# Altium PCB flowhw.PcbDoc (part 1 of 2)
Units mil, origin at the board's own origin, x right, y up, seen from the top; angles counter-clockwise.
Board outline 4650 x 1950 mil, 4 copper layers (Top Layer, Layer 1, Layer 2, Bottom Layer), stack 23.756 mil thick; 120 components, 77 nets, 417 pads, 937 vias.
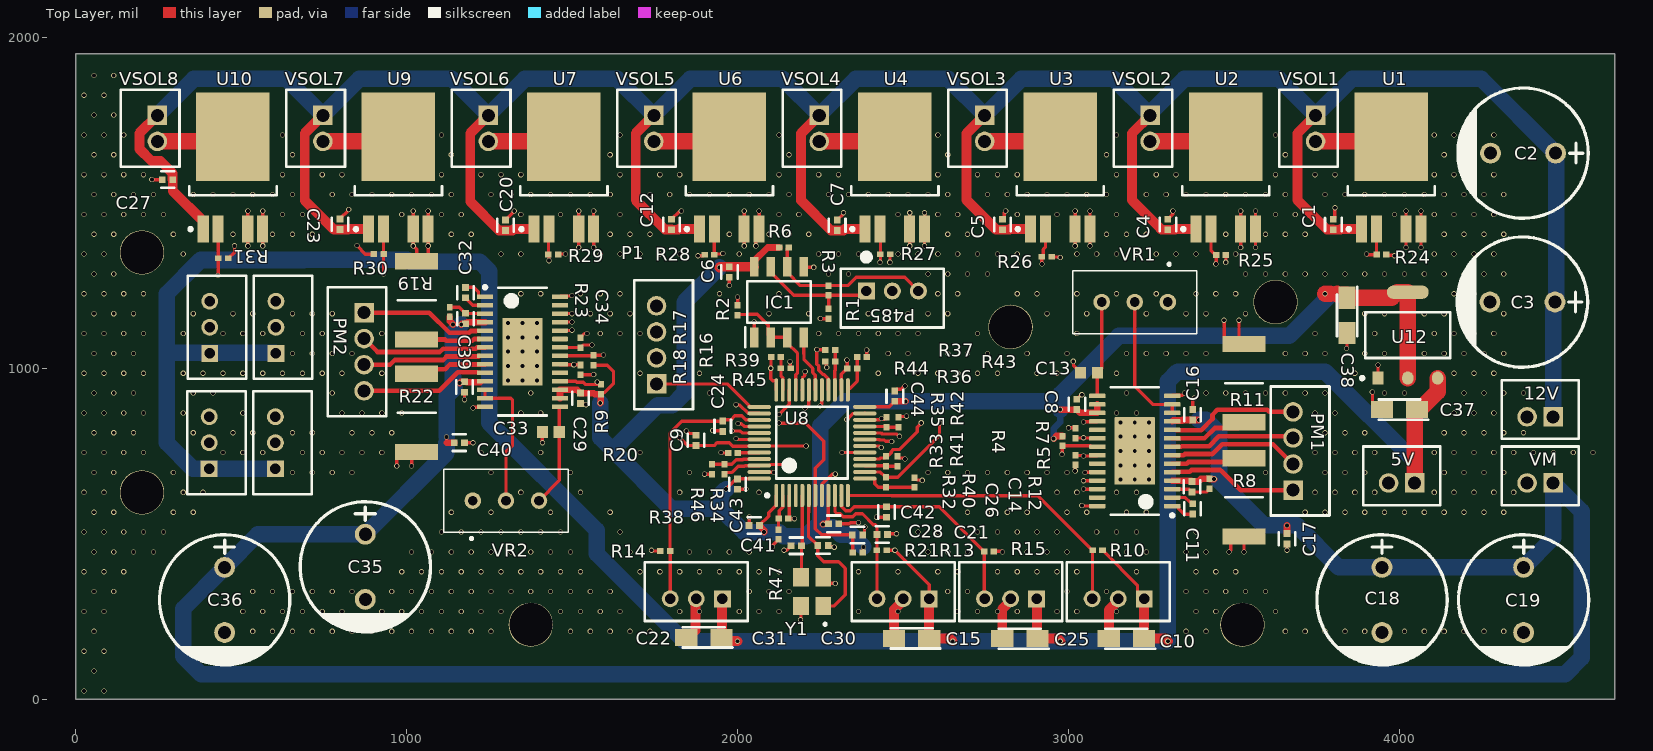
[diagram p0: Top Layer view]
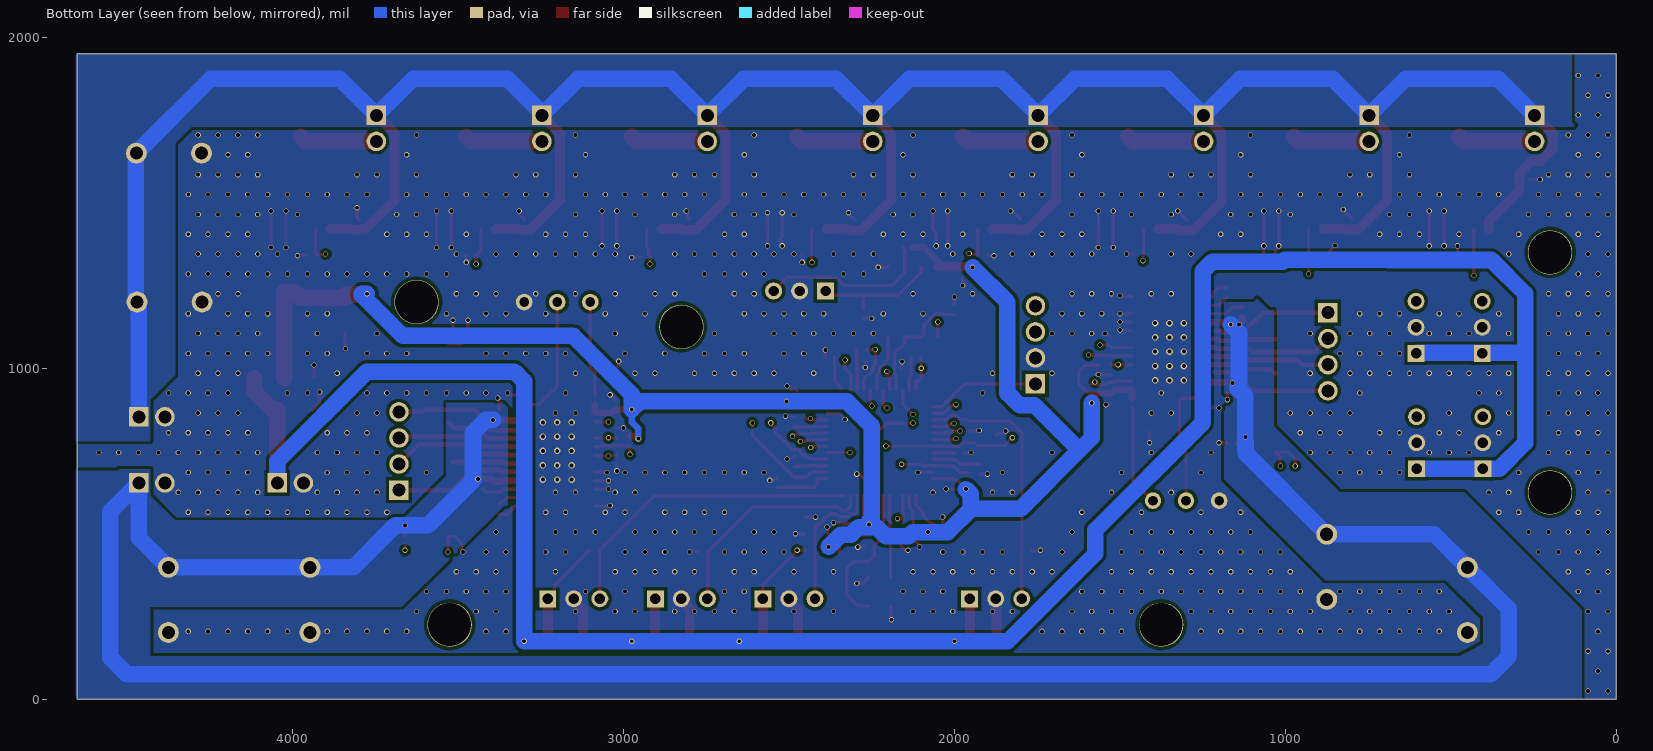
[diagram p1: Bottom Layer view, seen from below]
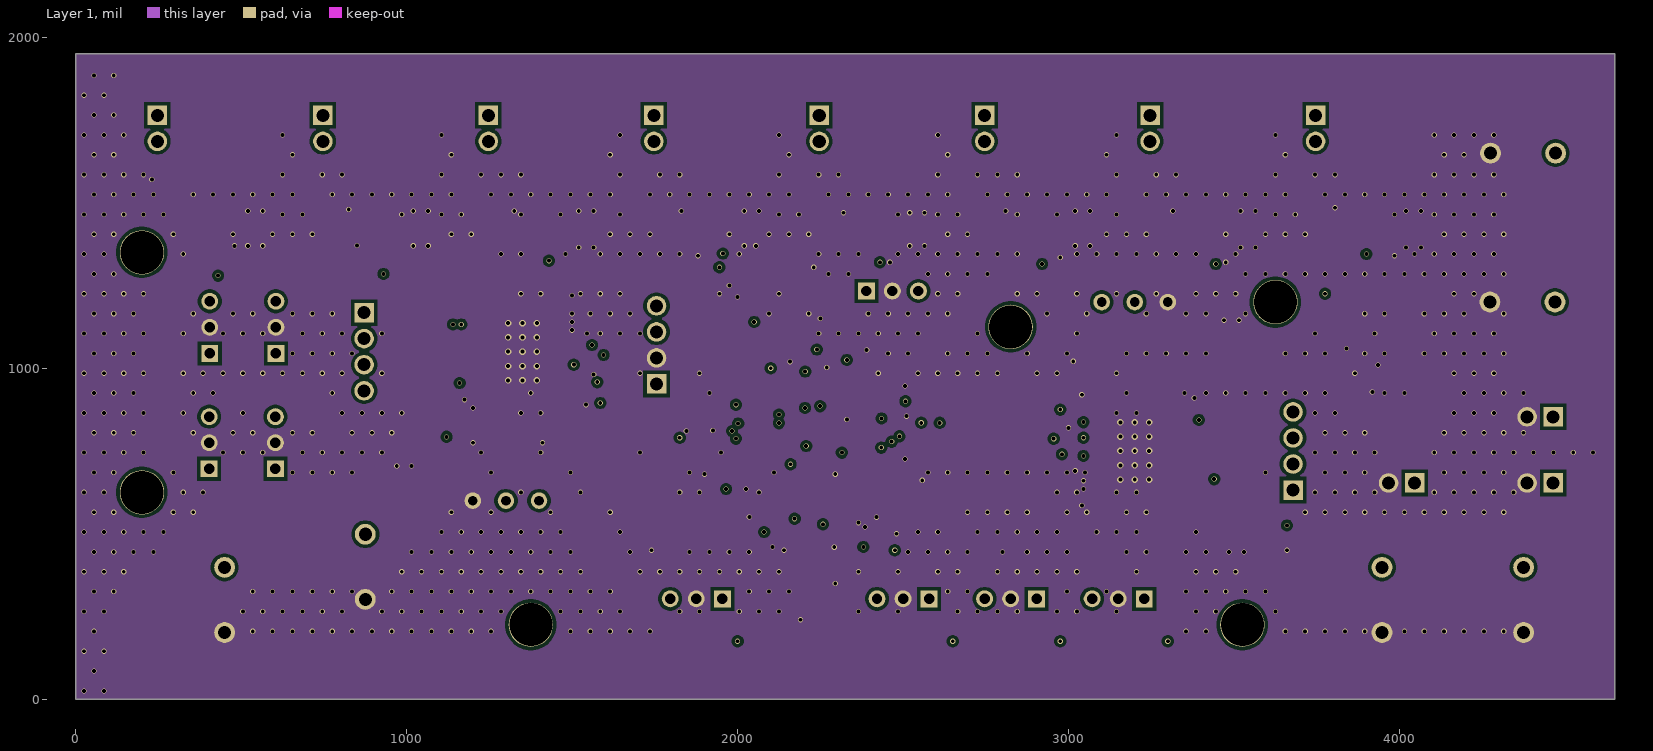
[diagram p2: Layer 1]
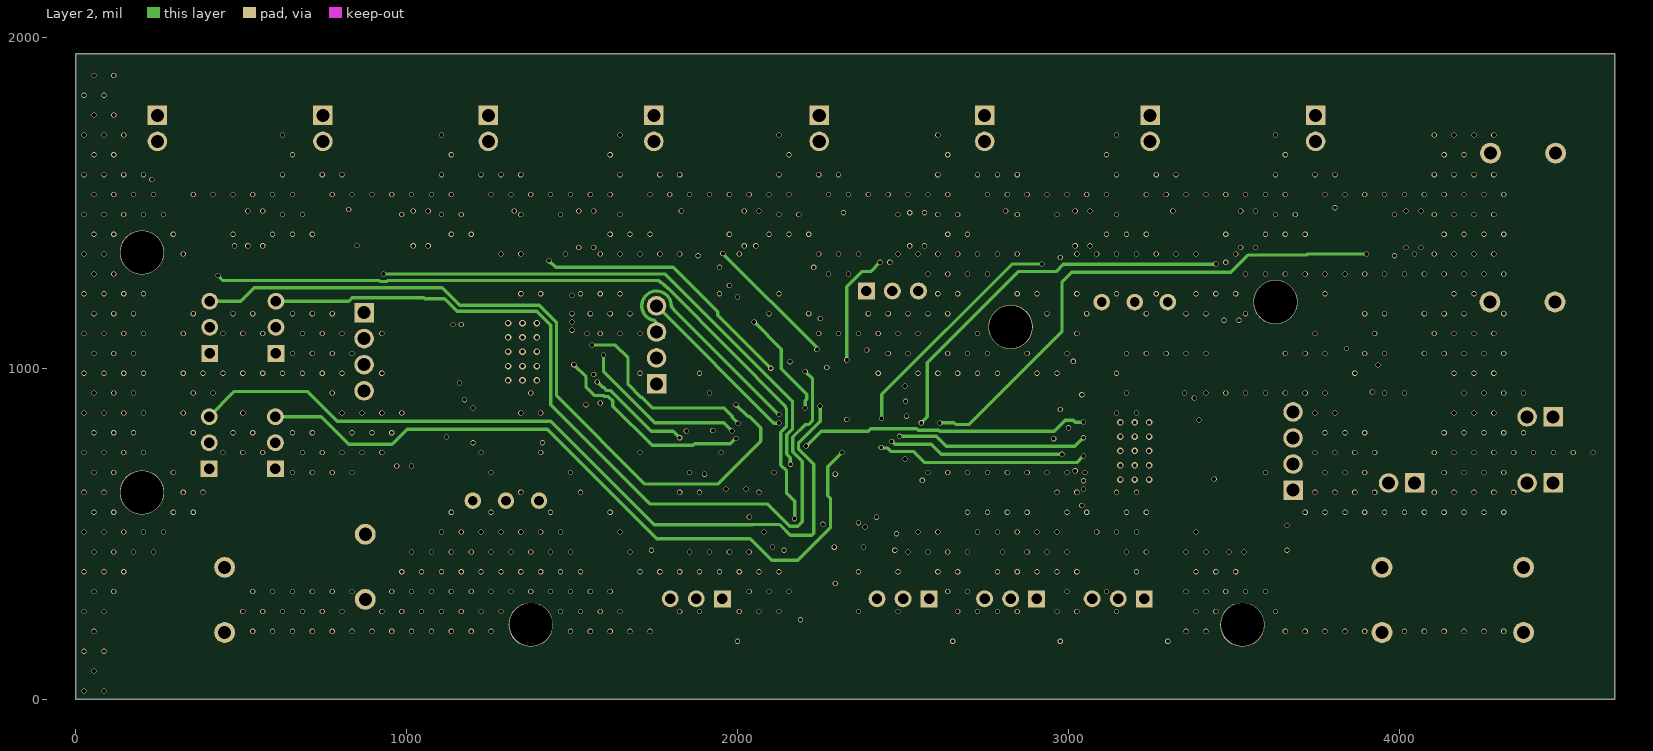
[diagram p3: Layer 2]

## Layer stack, top to bottom
Top Solder: solder mask 0.4, Solder Resist, Dk 3.5
Top Layer: signal copper 1.4
Dielectric 2: prepreg 2.8, PP-006, Dk 4.1
Layer 1: signal copper 1.378
Dielectric 1: dielectric 12.6, FR-4, Dk 4.8
Layer 2: signal copper 1.378
Dielectric 3: prepreg 2.8, PP-006, Dk 4.1
Bottom Layer: signal copper 1.4
Bottom Solder: solder mask 0.4, Solder Resist, Dk 3.5

## Board outline
0,1950 4650,1950 4650,0 0,0

## Design rules (kind name [scope] priority, off if disabled: settings)
Clearance [All] p1: gap=10 ignorepadtopadclearanceinfootprint=FALSE except(0: Arc-Hole Track-Hole SMDPad-Hole THPad-Hole Via-Hole Fill-Hole Poly-Hole Region-Hole Text-Hole; 6: Arc-SMDPad Track-SMDPad SMDPad-SMDPad; 8: Arc-Arc Arc-Track Track-Track)
HoleSize [All] p1: absolutevalues=TRUE maxlimit=500 minlimit=1 maxpercent=80.000 minpercent=20.000
MinimumSolderMaskSliver [All] p1: minsoldermaskwidth=1
PolygonConnect [HasFootprint('RESC1005X40X25LL05T10')] p1: connectstyle=Relief reliefconductorwidth=10 reliefentries=4 polygonreliefangle="90 Angle" airgapwidth=10
PolygonConnect PolygonConnect_2 [HasFootprint('FP-C0402-BB-MFG')] p2: connectstyle=Relief reliefconductorwidth=10 reliefentries=4 polygonreliefangle="90 Angle" airgapwidth=10
PolygonConnect PolygonConnect_1 [All] p3: connectstyle=Direct reliefconductorwidth=10 reliefentries=4 polygonreliefangle="90 Angle" airgapwidth=10
RoutingVias [All] p1: holewidth=11.81 width=15.75 viastyle="Through Hole" minholewidth=11.81 minwidth=15.75 maxholewidth=15.75 maxwidth=31.5
SilkToSilkClearance [All] p1: silktosilkclearance=6
SilkToSolderMaskClearance [IsPad] p1: minsilkscreentomaskgap=0.5 clearancetoexposedcopper=TRUE
SolderMaskExpansion [IsVia] p1: expansion=4 istentingtop=TRUE
SolderMaskExpansion SolderMaskExpansion_1 [All] p2: expansion=4 istentingtop=FALSE
Width [All] p1: maxlimit=50 minlimit=7 preferedwidth=10
26 further rules are at their usual default settings.

## Components (designator, comment, footprint, x,y, rotation, side; value= is the part's Value field where it differs from the comment)
5V "B2B-PH-K-S(LF)(SN)" JST-B2B-PH-K-S_V 4006.5,675 r180 top
12V "B2B-PH-K-S(LF)(SN)" JST-B2B-PH-K-S_V 4425,875 r180 top
C1 "100n" FP-C0402-BB-MFG 3800,1434.25 r270 top value="8.2 pF"
C2 "470uF" 470UF 4373.42,1650 r180 top
C3 "470uF" 470UF 4371.57,1200 r180 top
C4 "100n" FP-C0402-BB-MFG 3300,1434.25 r270 top value="8.2 pF"
C5 "100n" FP-C0402-BB-MFG 2800,1434.25 r270 top value="8.2 pF"
C6 "100n" FP-C0402-BB-MFG 1975,1290.75 r270 top value="8.2 pF"
C7 "100n" FP-C0402-BB-MFG 2300.9,1432.32 r270 top value="8.2 pF"
C8 "100n" FP-C0402-BB-MFG 3025,890.75 r90 top value="8.2 pF"
C9 "10n" FP-C0402-BB-MFG 1874.03,782.09 r90 top value="8.2 pF"
C10 "TAJA226K010RNJ" CAPPM3216X180N 3174.77,182.77 r180 top
C11 "10n" FP-C0402-BB-MFG 3375,575 r270 top value="8.2 pF"
C12 "100n" FP-C0402-BB-MFG 1800,1434.25 r270 top value="8.2 pF"
C13 "0.47uf" CAPC1608X90X35LL15T15 3061.28,986.31 r0 top
C14 "100n" FP-C0402-BB-MFG 3373.24,641.74 r270 top value="8.2 pF"
C15 "TAJA226K010RNJ" CAPPM3216X180N 2525.97,183.64 r180 top
C16 "100n" FP-C0402-BB-MFG 3375,859.25 r270 top value="8.2 pF"
C17 "100n" FP-C0402-BB-MFG 3660,485 r90 top value="8.2 pF"
C18 "470uF" 470UF 3947.19,300 r270 top
C19 "470uF" 470UF 4375,300 r270 top
C20 "100n" FP-C0402-BB-MFG 1298.3,1431.88 r270 top value="8.2 pF"
C21 "10n" FP-C0402-BB-MFG 2437.16,497.52 r0 top value="8.2 pF"
C22 "TAJA226K010RNJ" CAPPM3216X180N 1897.78,186.85 r180 top
C23 "100n" FP-C0402-BB-MFG 798.32,1435.27 r270 top value="8.2 pF"
C24 "10n" FP-C0402-BB-MFG 1955,825 r270 top value="8.2 pF"
C25 "TAJA226K010RNJ" CAPPM3216X180N 2852.79,182.83 r180 top
C26 "10n" FP-C0402-BB-MFG 2450,565.75 r270 top value="8.2 pF"
C27 "100n" FP-C0402-BB-MFG 277.51,1569.91 r0 top value="8.2 pF"
C28 "10n" FP-C0402-BB-MFG 2362.26,496.47 r0 top value="8.2 pF"
C29 "100n" FP-C0402-BB-MFG 1525,909.25 r270 top value="8.2 pF"
C30 "20p" FP-C0402-BB-MFG 2257.82,464.47 r0 top value="8.2 pF"
C31 "20p" FP-C0402-BB-MFG 2177.32,463.65 r0 top value="8.2 pF"
C32 "10n" FP-C0402-BB-MFG 1177.45,1228.62 r90 top value="8.2 pF"
C33 "0.47uf" CAPC1608X90X35LL15T15 1435.52,807.08 r0 top
C34 "100n" FP-C0402-BB-MFG 1177.44,1150.11 r90 top value="8.2 pF"
C35 "470uF" 470UF 875,400 r270 top
C36 "470uF" 470UF 450,300 r270 top
C37 "TAJA106K016RNJV" CAPPM3216X180N 4000,875 r180 top
C38 "TAJA226K010RNJ" CAPPM3216X180N 3841.61,1159.96 r270 top
C39 "100n" FP-C0402-BB-MFG 1174.6,943.43 r90 top value="8.2 pF"
C40 "100n" FP-C0402-BB-MFG 1159.25,775 r180 top value="8.2 pF"
C41 "100n" FP-C0402-BB-MFG 2050,525 r0 top value="8.2 pF"
C42 "100n" FP-C0402-BB-MFG 2290,530 r180 top value="8.2 pF"
C43 "100n" FP-C0402-BB-MFG 2000,650 r90 top value="8.2 pF"
C44 "100n" FP-C0402-BB-MFG 2475,915.75 r270 top value="8.2 pF"
IC1 "ST1480ABDR" SOIC127P600X175-8N 2125,1200 r90 top
P1 "B4B-PH-K-S(LF)(SN)" JST-B4B-PH-K-S_V 1776.65,1070.63 r90 top
P485 "B3B-PH-K-S(LF)(SN)" JST-B3B-PH-K-S-3_V 2467.63,1211.76 r0 top
PM1 "B4B-PH-K-S(LF)(SN)" JST-B4B-PH-K-S_V 3700,750 r90 top
PM2 "B4B-PH-K-S(LF)(SN)" JST-B4B-PH-K-S_V 850,1050 r270 top
R1 "4.7k" RESC1005X40X25LL05T10 2275,1164.76 r90 top
R2 "10k" RESC1005X40X25LL05T10 2000,1175 r90 top
R3 "120" RESC1005X40X25LL05T10 2275,1235.24 r90 top
R4 "10k" RESC1005X40X25LL05T10 2981.2,780.34 r270 top
R5 "10k" RESC1005X40X25LL05T10 3020.82,723.03 r90 top
R6 "4.7k" RESC1005X40X25LL05T10 2140.47,1365 r180 top
R7 "10k" RESC1005X40X25LL05T10 3020.82,803.23 r270 top
R8 "CR2512-F_-1R00ELF" RESC6331X75N 3530,610 r270 top
R9 "10k" RESC1005X40X25LL05T10 1586.96,936.28 r90 top
R10 "4.7k" RESC1005X40X25LL05T10 3087.8,449.93 r180 top
R11 "CR2512-F_-1R00ELF" RESC6331X75N 3530,955 r90 top
R12 "1M" RESC1005X40X25LL05T10 3425.7,650.95 r270 top
R13 "4.7k" RESC1005X40X25LL05T10 2435.85,449.93 r0 top
R14 "4.7k" RESC1005X40X25LL05T10 1781.19,447.86 r180 top
R15 "4.7k" RESC1005X40X25LL05T10 2759.35,446.78 r0 top
R16 "10k" RESC1005X40X25LL05T10 1564.56,1023.98 r90 top
R17 "10k" RESC1005X40X25LL05T10 1525,1076.97 r270 top
R18 "10k" RESC1005X40X25LL05T10 1525,995.08 r90 top
R19 "CR2512-F_-1R00ELF" RESC6331X75N 1030,1205 r90 top
R20 "4.7k" RESC1005X40X25LL05T10 1985.94,743.39 r180 top
R21 "100k" RESC1005X40X25LL05T10 2363.17,442.95 r0 top
R22 "CR2512-F_-1R00ELF" RESC6331X75N 1030,865 r270 top
R23 "1M" RESC1005X40X25LL05T10 1130,1170 r90 top
R24 "10k" RESC1005X40X25LL05T10 3945.45,1343.23 r0 top
R25 "10k" RESC1005X40X25LL05T10 3460.68,1341.75 r0 top
R26 "10k" RESC1005X40X25LL05T10 2933.82,1336.87 r0 top
R27 "10k" RESC1005X40X25LL05T10 2446.47,1344.53 r0 top
R28 "10k" RESC1005X40X25LL05T10 1914.74,1343.1 r180 top
R29 "10k" RESC1005X40X25LL05T10 1443.16,1343.21 r0 top
R30 "10k" RESC1005X40X25LL05T10 915.49,1344.76 r180 top
R31 "10k" RESC1005X40X25LL05T10 445.76,1332.39 r0 top
R32 "3.3k" RESC1005X40X25LL05T10 2448.47,655.58 r90 top
R33 "3.3k" RESC1005X40X25LL05T10 2448.47,718.63 r90 top
R34 "3.3k" RESC1005X40X25LL05T10 1960,695 r90 top
R35 "3.3k" RESC1005X40X25LL05T10 2450.38,836.66 r270 top
R36 "3.3k" RESC1005X40X25LL05T10 2346.6,999.51 r0 top
R37 "3.3k" RESC1005X40X25LL05T10 2280,1055 r0 top
R38 "3.3k" RESC1005X40X25LL05T10 2138.79,546.22 r0 top
R39 "3.3k" RESC1005X40X25LL05T10 2116.15,1033.64 r180 top
R40 "100k" RESC1005X40X25LL05T10 2535,655 r90 top
R41 "100k" RESC1005X40X25LL05T10 2483.65,718.96 r90 top
R42 "100k" RESC1005X40X25LL05T10 2485.8,836.7 r90 top
R43 "100k" RESC1005X40X25LL05T10 2375.84,1034.41 r0 top
R44 "100k" RESC1005X40X25LL05T10 2280,1020 r180 top
R45 "100k" RESC1005X40X25LL05T10 2145.63,999.83 r0 top
R46 "100k" RESC1005X40X25LL05T10 1923.12,695.01 r270 top
R47 "100k" RESC1005X40X25LL05T10 2123.11,497.39 r270 top
U1 "BTS3256D" INF-PG-TO252-5-1_M 3975,1607.48 r90 top
U2 "BTS3256D" INF-PG-TO252-5-1_M 3475,1607.48 r90 top
U3 "BTS3256D" INF-PG-TO252-5-1_M 2975,1607.48 r90 top
U4 "BTS3256D" INF-PG-TO252-5-1_M 2475,1607.48 r90 top
U6 "BTS3256D" INF-PG-TO252-5-1_M 1975,1607.48 r90 top
U7 "BTS3256D" INF-PG-TO252-5-1_M 1475,1607.48 r90 top
U8 "STM32F051C8T6" STM-LQFP48_N 2225,775 r90 top
U9 "BTS3256D" INF-PG-TO252-5-1_M 975,1607.48 r90 top
U10 "BTS3256D" INF-PG-TO252-5-1_M 475,1607.48 r90 top
U12 "AMS1117-3.3" FP-AMS1117-IPC_C 4025,1100 r90 top
VM "B2B-PH-K-S(LF)(SN)" JST-B2B-PH-K-S_V 4425,675 r180 top
VR1 "3296W-1-103" 3296W1103 3300,1200 r270 top
VR2 "3296W-1-103" 3296W1103 1200,600 r90 top
VSOL1 "B2B-PH-K-S(LF)(SN)" JST-B2B-PH-K-S_V 3725,1725 r270 top
VSOL2 "B2B-PH-K-S(LF)(SN)" JST-B2B-PH-K-S_V 3225,1725 r270 top
VSOL3 "B2B-PH-K-S(LF)(SN)" JST-B2B-PH-K-S_V 2725,1725 r270 top
VSOL4 "B2B-PH-K-S(LF)(SN)" JST-B2B-PH-K-S_V 2225,1725 r270 top
VSOL5 "B2B-PH-K-S(LF)(SN)" JST-B2B-PH-K-S_V 1725,1725 r270 top
VSOL6 "B2B-PH-K-S(LF)(SN)" JST-B2B-PH-K-S_V 1225,1725 r270 top
VSOL7 "B2B-PH-K-S(LF)(SN)" JST-B2B-PH-K-S_V 725,1725 r270 top
VSOL8 "B2B-PH-K-S(LF)(SN)" JST-B2B-PH-K-S_V 225,1725 r270 top
Y1 "X322516MLB4SI" X322516MLB4SI 2225,325 r90 top

## Footprints (in the part's own frame and the unit in brackets; to place one, negate y for a bottom-side part, rotate by r counter-clockwise, add the part's x,y. Pads: shape width x height; smd on the part's side, far side on the other; paste and mask are expansions set on the pad)
470UF [mm]
  round 1.6 hole 1: 1(-2.5,0) 2(2.5,0)
  silkscreen extent -5,-5 5.08,5
3296W1103 [mm]
  round 1.269 hole 0.74: 1(0,0) 2(0,-2.54) 3(0,-5.08)
  silkscreen extent -3,-7.3 2.42,2.22, body extent -2.42,-7.29 2.42,2.21, height 11.44
CAPC1608X90X35LL15T15 [mm] "Chip Capacitor, 2-Leads, Body 1.60x0.81mm, IPC High Density"
  rect 0.85x0.9 smd: 1(-0.65,0) 2(0.65,0)
  body extent -0.88,-0.48 0.87,0.48, height 0.9
CAPPM3216X180N [mm]
  rect 1.7x1.3 smd: 1(-1.35,0) 2(1.35,0)
  silkscreen extent -2.2,-0.77 1.6,0.77, body extent -1.6,-0.77 1.6,0.77, height 1.8
FP-AMS1117-IPC_C [mm]
  rect 1.004x0.872 smd paste+0 mask+0: 1(-3.295,2.29)
  rrect100% 1.004x0.872 smd paste+0 mask+0: 2(-3.295,0) 3(-3.295,-2.29)
  rrect87% 1.004x3.182 smd paste+0 mask+0: 4(3.295,0)
  silkscreen extent -3.42,-3.25 1.75,3.62, body extent -3.9,-3.35 3.9,3.35, height 0.25
FP-C0402-BB-MFG [mm]
  rect 0.52x0.52 smd paste+0 mask+0: 1(-0.4,0) 2(0.4,0)
  silkscreen extent -0.5,-0.64 0.5,0.64, body extent -0.8,-0.4 0.8,0.4, height 0.25
INF-PG-TO252-5-1_M [mm] "DPAK, 5-Leads, Body 6.5x6.12mm, Pitch 1.14mm, IPC Low Density"
  rect 2.05x0.85 smd: 1(-4.75,2.28) 2(-4.75,1.14) 4(-4.75,-1.14) 5(-4.75,-2.28)
  rect 6.8x5.65 smd: 3(2.35,0)
  silkscreen extent -4.87,-3.35 -1.45,3.38, body extent -2.15,-3.32 4.07,3.32, height 2.35
JST-B2B-PH-K-S_V [mm] "Connector, 2-Leads, Body 5.9x4.5mm, Pitch 2mm"
  rect 1.5x1.5 hole 1: 1(-1,0.55)
  round 1.5 hole 1: 2(1,0.55)
  silkscreen extent -2.95,-2.25 2.95,2.25, body extent -2.95,-2.25 2.95,2.25, height 6
JST-B3B-PH-K-S-3_V [mm] "Connector, 3-Leads, Body 7.9x4.5mm, Pitch 2mm"
  rect 1.3x1.3 hole 0.8: 1(-2,0.55)
  round 1.3 hole 0.8: 2(0,0.55) 3(2,0.55)
  silkscreen extent -3.95,-2.25 3.95,3.4, body extent -3.95,-2.25 3.95,2.25, height 6
JST-B4B-PH-K-S_V [mm] "Connector, 4-Leads, Body 9.9x4.5mm, Pitch 2mm"
  rect 1.5x1.5 hole 1: 1(-3,0.55)
  round 1.5 hole 1: 2(-1,0.55) 3(1,0.55) 4(3,0.55)
  silkscreen extent -4.95,-2.25 4.95,2.25, body extent -4.95,-2.25 4.95,2.25, height 6
RESC1005X40X25LL05T10 [mm] "Chip Resistor, 2-Leads, Body 1.00x0.50mm, IPC High Density"
  rect 0.5x0.45 smd: 1(-0.375,0) 2(0.375,0)
  body extent -0.53,-0.27 0.53,0.28, height 0.4
RESC6331X75N [mm]
  rect 1.25x3.3 smd: 1(-3,0) 2(3,0)
  silkscreen extent 0,-1.45 0,1.45, body extent -3.15,-1.55 3.15,1.55, height 0.75
SOIC127P600X175-8N [mm]
  rect 1.525x0.65 smd: 1(-2.712,1.905) 2(-2.712,0.635) 3(-2.712,-0.635) 4(-2.712,-1.905) 5(2.712,-1.905) 6(2.712,-0.635) 7(2.712,0.635) 8(2.712,1.905)
  silkscreen extent -3.47,-2.45 1.6,2.58, body extent -3,-2.45 3,2.45, height 1.75
STM-LQFP48_N [mm] "QFP, 48-Leads, Body 7x7mm, Pitch 0.5mm, IPC Medium Density"
  oval 1.8x0.3 smd: 1(-4.05,2.75) 2(-4.05,2.25) 3(-4.05,1.75) 4(-4.05,1.25) 5(-4.05,0.75) 6(-4.05,0.25) 7(-4.05,-0.25) 8(-4.05,-0.75) 9(-4.05,-1.25) 10(-4.05,-1.75) 11(-4.05,-2.25) 12(-4.05,-2.75) 25(4.05,-2.75) 26(4.05,-2.25) 27(4.05,-1.75) 28(4.05,-1.25) 29(4.05,-0.75) 30(4.05,-0.25) 31(4.05,0.25) 32(4.05,0.75) 33(4.05,1.25) 34(4.05,1.75) 35(4.05,2.25) 36(4.05,2.75)
  oval 0.3x1.8 smd: 13(-2.75,-4.05) 14(-2.25,-4.05) 15(-1.75,-4.05) 16(-1.25,-4.05) 17(-0.75,-4.05) 18(-0.25,-4.05) 19(0.25,-4.05) 20(0.75,-4.05) 21(1.25,-4.05) 22(1.75,-4.05) 23(2.25,-4.05) 24(2.75,-4.05) 37(2.75,4.05) 38(2.25,4.05) 39(1.75,4.05) 40(1.25,4.05) 41(0.75,4.05) 42(0.25,4.05) 43(-0.25,4.05) 44(-0.75,4.05) 45(-1.25,4.05) 46(-1.75,4.05) 47(-2.25,4.05) 48(-2.75,4.05)
  silkscreen extent -4.17,-2.75 2.75,3.57, body extent -3.5,-3.5 3.5,3.5, height 1.6
X322516MLB4SI [mm]
  rect 1.4x1.2 smd: 1(-1.1,-0.85) 2(1.1,-0.85) 3(1.1,0.85) 4(-1.1,0.85)
  silkscreen extent -2.6,-1.1 -2.4,-0.9, body extent -1.6,-1.25 1.6,1.25, height 0.7

## Part data
5V 12V VM VSOL1 VSOL2 VSOL3 VSOL4 VSOL5 VSOL6 VSOL7 VSOL8: library part CMP-2000-05162-1, "Male Header, Pitch 2 mm, 1 x 2 Position, Height 6 mm, Tail Length 3.4 mm, -25 to 85 degC, RoHS, Bulk", Manufacturer=JST, Datasheet URL=http://datasheet.octopart.com/B2B-PH-K-S%28LF%29%28SN%29-JST-datasheet-8324864.pdf, Datasheet Version=Nov-08, Manufacturer URL=http://www.jst.com/home2.html, No of Positions=2, Pitch=2mm, Style/Orientation=StraightHeader/Plug, Termination=Crimp, Type=ShroudedHeader
C1 C4 C5 C6 C7 C8 C9 C11 C12 C14 C16 C17 C20 C21 C23 C24 C26 C27 C28 C29 C30 C31 C32 C34 C39 C40 C41 C42 C43 C44: library part CMP-03020-024178-1, "C0402 8.2 pF C0G 0.5 pF 50 V", Capacitance="8.2 pF", Manufacturer=Kemet, Manufacturer Part Number=C0402C829D5GACAUTO, Package=C0402-BB, Temperature="-55°C to +125°C", Temperature Characteristic=C0G, Temperature Coefficient=15%, Temperature Range High=+125°C, Temperature Range Low=-55°C, Tolerance="0.5 pF", Voltage Rating="50 V", Automotive=No, Category=Cap, ComponentLink2Description=Datasheet, ComponentLink2URL=https://content.kemet.com/datasheets/KEM_C1002_X7R_SMD.pdf, Device Class L1="Passive Components", Device Class L2=Capacitors, Device Class L3="Ceramic Capacitors", Height=0.55mm, Ipc Land Pattern Name=CAPC10050X50, Lead Free=Yes, Material=Ceramic, Octopart=https://octopart.com/c0402c829d5gacauto-kemet-89441553, RoHS=TRUE
C2 C3 C18 C19 C35 C36: library part SPZ1VM471G13O00RAXXX, Equivalent Series Resistance(ESR)=-, JLCPCB Part Class="Extended Part", LCSC Part Name="470uF ±20% 35V", Manufacturer=AISHI(艾华集团), Operating Temperature=-55℃~+105℃, Tolerance=±20%, Voltage Rating=35V, Add into BOM=yes, Convert to PCB=yes, Datasheet=https://item.szlcsc.com/datasheet/SPZ1VM471G13O00RAXXX/2802119.html, Device=SPZ1VM471G13O00RAXXX, Diameter=10mm, Height - Seated (Max)=13mm, Lifetime=2000hrs@105℃, Manufacturer Part=SPZ1VM471G13O00RAXXX, Pin Spacing=-, Ripple Current=-, Supplier=LCSC, Supplier Footprint=插件,D10xL13mm, Supplier Part=C2691847, Symbol=SPZ1VM471G13O00RAXXX, Type=Polymer
C10 C15 C22 C25 C38: "Capacitor Polarised", Manufacturer_Name="Kyocera AVX", Mouser Part Number=581-TAJA226K010R, Arrow Part Number=TAJA226K010RNJ, Arrow Price/Stock=https://www.arrow.com/en/products/taja226k010rnj/avx?region=nac, Datasheet Link=http://www.farnell.com/datasheets/1680476.pdf, Height=1.8mm, Manufacturer_Part_Number=TAJA226K010RNJ, Mouser Price/Stock=https://www.mouser.co.uk/ProductDetail/KYOCERA-AVX/TAJA226K010RNJ?qs=ZfDiupplM3QM%252BN91%252BvwCuQ%3D%3D
C13 C33: library part CMP-2006-02133-1, Manufacturer="AVX Interconnect / Elco", Part Number=0603ZC101KAT2A
C37: "Capacitor Polarised", Manufacturer_Name="Kyocera AVX", Mouser Part Number=581-TAJA106K016RNJV, Arrow Part Number=TAJA106K016RNJV, Arrow Price/Stock=https://www.arrow.com/en/products/taja106k016rnjv/avx?utm_currency=USD&region=nac, Datasheet Link=http://www.farnell.com/datasheets/1680476.pdf, Height=1.8mm, Manufacturer_Part_Number=TAJA106K016RNJV, Mouser Price/Stock=https://www.mouser.co.uk/ProductDetail/KYOCERA-AVX/TAJA106K016RNJV?qs=X421pCAdHWe2u1fVMeO6XQ%3D%3D
IC1: "Integrated Circuit", Manufacturer_Name=STMicroelectronics, Mouser Part Number=511-ST1480ABDR, Arrow Part Number=ST1480ABDR, Arrow Price/Stock=https://www.arrow.com/en/products/st1480abdr/stmicroelectronics?region=nac, Datasheet Link=https://www.st.com/resource/en/datasheet/st1480ab.pdf, Height=1.75mm, Manufacturer_Part_Number=ST1480ABDR, Mouser Price/Stock=https://www.mouser.co.uk/ProductDetail/STMicroelectronics/ST1480ABDR?qs=U1cgCdF9Le885kMYiMY8iw%3D%3D
P1 PM1 PM2: library part CMP-2000-05165-1, "Male Header, Pitch 2 mm, 1 x 4 Position, Height 6 mm, Tail Length 3.4 mm, -25 to 85 degC, RoHS, Bulk", Manufacturer=JST, Datasheet URL=http://datasheet.octopart.com/B4B-PH-K-S%28LF%29%28SN%29-JST-datasheet-10558886.pdf, Datasheet Version=Apr-09, Manufacturer URL=http://www.jst.com/home2.html, No of Positions=4, Pitch=2mm, Style/Orientation=StraightHeader/Plug, Termination=Crimp, Type=ShroudedHeader
P485: library part CMP-2000-05164-1, "Male Header, Pitch 2 mm, 1 x 3 Position, Height 6 mm, Tail Length 3.4 mm, -25 to 85 degC, RoHS, Bulk", Manufacturer=JST, Datasheet URL=https://datasheet.ciiva.com/11746/0900766b80826550-11746939.pdf, Datasheet Version=Oct-06, Manufacturer URL=http://www.jst.com/home2.html, No of Positions=3, Pitch=2mm, Style/Orientation=StraightHeader/Plug, Termination=Crimp, Type=ShroudedHeader
R1 R2 R3 R4 R5 R6 R7 R9 R10 R12 R13 R14 R15 R16 R17 R18 R20 R21 R23 R24 R25 R26 R27 R28 R29 R30 R31 R32 R33 R34 R35 R36 R37 R38 R39 R40 R41 R42 R43 R44 R45 R46 R47: library part CMP-2002-07161-1, Manufacturer="Yageo / Phycomp", Part Number=RC0402FR-0720R5L
R8 R11 R19 R22: "Resistor", Arrow Part Number=CR2512-F/-1R00ELF, Manufacturer_Name=Bourns, Mouser Part Number=652-CR2512-F/1R00ELF, Arrow Price/Stock=https://www.arrow.com/en/products/cr2512-f-1r00elf/bourns?utm_currency=USD&region=europe, Height=0.75mm, Manufacturer_Part_Number=CR2512-F/-1R00ELF, Mouser Price/Stock=https://www.mouser.co.uk/ProductDetail/Bourns/CR2512-F-1R00ELF?qs=W%2FMpXkg%252BdQ6b1PcPiGLK9Q%3D%3D
U1 U2 U3 U4 U6 U7 U9 U10: library part CMP-1137-00035-1, "HITFET 10 mOhm Smart Power Single Channel Low Side Switch with Restart and Variable Slew Rate, 40 V VDS, ID, -40 to 150 degC, PG-TO252-5-1, Reel, Green", Manufacturer=Infineon, Channels=1, ComponentLink1Description="Manufacturer URL", ComponentLink1URL=http://www.infineon.com/, ComponentLink2Description=Datasheet, ComponentLink2URL=http://www.infineon.com/dgdl/BTS3256_DS_10.pdf?folderId=db3a3043163797a6011667aa084c0e01&fileId=db3a304320d39d590121a175cad77b78&location=en.Products.Automotive_ICs.Smart_High-_and_Low-Side_Switches.HITFET___TEMPFET__-_Smart_Low-Side_Switches.DATASHEET.BTS, ComponentLink3Description="Package Specification", ComponentLink3URL=http://www.infineon.com/cms/packages/SMD_-_Surface_Mounted_Devices/P-PG-TO252/P-PG-TO252-05-001.html?__locale=en, DatasheetVersion="Rev. 1.0", Green=TRUE, Group=HITFET, Halogen-free=TRUE, ID(lim) (min)="42 A", ID(nom)="7.5 A", ISC (max)="30 A", Mounting Technology="Surface Mount", PackageDescription="5-Pin Plastic (Green) Transistor Single Outline Package, 6.5 x 6.12 mm Body, 1.14 mm Pitch", PackageReference=PG-TO252-5-1, Packing=Reel, PartNumber=BTS3256D, RDS (on)(max)="10 mOhm", toff (max)="24 us", ton (max)="22 us", VDS (max)="40 V"
U8: library part CMP-0304-00010-3, "ARM Cortex-M0 32-bit MCU, 64 KB Flash, 8 KB Internal RAM, 39 I/Os, 48-pin LQFP, -40 to 85 degC, Tray", I/Os (High Current)=39, Operating Frequency(F) (Processor speed) (MHz)=48, Supply Voltage(Vcc) min (V)=2, ComponentLink1Description="Manufacturer URL", ComponentLink1URL=http://www.st.com/web/en/home.html, ComponentLink2Description=Datasheet, ComponentLink2URL=http://www.st.com/st-web-ui/static/active/en/resource/technical/document/datasheet/DM00039193.pdf, ComponentLink3Description="Package Specification", ComponentLink3URL=http://www.st.com/st-web-ui/static/active/en/resource/technical/document/datasheet/DM00058181.pdf, Core="ARM Cortex-M0", DatasheetVersion="Rev. 3", FLASH Size (Prog) (kB)=64, Internal RAM Size (kB)=8, Mounting Technology="Surface Mount", PackageDescription="48-Pin Low Profile Quad Flat Package, 7 x 7 mm Body, 0.5 mm Pitch", PackageReference=LQFP48, PackageVersion="Rev. 6, 06/2013", Packing=Tray, PartNumber=STM32F051C8T6
U12: library part CMP-209535-000001-1, "LDO Voltage Regulators 1A, 3.3V", Dropout Voltage=1.1V, Manufacturer="Advanced Monolithic Systems", Max Junction Temp=+125°C, Max Power Dissipation=1.2W, Max Supply Voltage=15V, Nominal Supply Current=5mA, Output Current=1A, Output Voltage=3.3V, Package=AMS1117, Temperature="-40°C to +125°C", Temperature Range Low=-40°C, Automotive=No, Category=IC, ComponentLink2Description=Datasheet, ComponentLink2URL=http://www.advanced-monolithic.com/pdf/ds1117.pdf, Device Class L1="Integrated Circuits (ICs)", Device Class L2="Power Management ICs", Device Class L3="Voltage Regulators - Linear", Height=1.8mm, Ipc Land Pattern Name=SOT229P700X180-4, Lead Free=Yes, Manufacturer Part Number=AMS1117-3.3, Number Of Outputs=1, Octopart=https://octopart.com/ams1117-3.3-advanced+monolithic+systems-25899300, Output Type=Fixed, RoHS=TRUE, Standoff Height=0.64mm, Temperature Range High=+125°C
VR1 VR2: "Variable Resistor", Manufacturer_Name="Chengdu Guosheng Tech", Datasheet Link=https://datasheet.lcsc.com/szlcsc/1811271436_Chengdu-Guosheng-Tech-3296W-1-103_C330432.pdf, Height=10.28mm, Manufacturer_Part_Number=3296W-1-103
Y1: "Crystal or Oscillator", Manufacturer_Name="Yangxing Tech", Datasheet Link=https://datasheet.lcsc.com/szlcsc/Yangxing-Tech-X322516MLB4SI_C13738.pdf, Height=0.8mm, Manufacturer_Part_Number=X322516MLB4SI

## Free pads (board coordinates)
  rect 51.18x51.18 hole 31.5: 1(403.35,696.26) 1(405,1045) 1(603.35,696.26) 1(605,1045) 1(1953.74,303.35) 1(2578.74,303.35) 1(2903.74,303.35) 1(3228.74,303.35)
  rrect29% 49.21x13.78 smd: 1(1236.81,1216.34) 1(3313.19,583.66) 2(1236.81,1190.75) 2(3313.19,609.25) 3(1236.81,1165.16) 3(3313.19,634.84) 4(1236.81,1139.57) 4(3313.19,660.43) 5(1236.81,1113.98) 5(3313.19,686.02) 6(1236.81,1088.39) 6(3313.19,711.61) 7(1236.81,1062.8) 7(3313.19,737.2) 8(1236.81,1037.2) 8(3313.19,762.8) 9(1236.81,1011.61) 9(3313.19,788.39) 10(1236.81,986.02) 10(3313.19,813.98) 11(1236.81,960.43) 11(3313.19,839.57) 12(1236.81,934.84) 12(3313.19,865.16) 13(1236.81,909.25) 13(3313.19,890.75) 14(1236.81,883.66) 14(3313.19,916.34) 15(1463.19,883.66) 15(3086.81,916.34) 16(1463.19,909.25) 16(3086.81,890.75) 17(1463.19,934.84) 17(3086.81,865.16) 18(1463.19,960.43) 18(3086.81,839.57) 19(1463.19,986.02) 19(3086.81,813.98) 20(1463.19,1011.61) 20(3086.81,788.39) 21(1463.19,1037.2) 21(3086.81,762.8) 22(1463.19,1062.8) 22(3086.81,737.2) 23(1463.19,1088.39) 23(3086.81,711.61) 24(1463.19,1113.98) 24(3086.81,686.02) 25(1463.19,1139.57) 25(3086.81,660.43) 26(1463.19,1165.16) 26(3086.81,634.84) 27(1463.19,1190.75) 27(3086.81,609.25) 28(1463.19,1216.34) 28(3086.81,583.66)
  round 51.18 hole 31.5: 2(403.35,775) 2(405,1123.74) 2(603.35,775) 2(605,1123.74) 2(1875,303.35) 2(2500,303.35) 2(2825,303.35) 2(3150,303.35) 3(403.35,853.74) 3(405,1202.48) 3(603.35,853.74) 3(605,1202.48) 3(1796.26,303.35) 3(2421.26,303.35) 3(2746.26,303.35) 3(3071.26,303.35)
  round 133.86 hole 129.92 unplated mask+0: 6(200,625) 6(200,1350) 6(1375,225) 6(2825,1125) 6(3525,225) 6(3625,1200)
  rrect3% 122.05x203.94 smd: 29(1350,1050) 29(3200,750)

## Via types
v1: diameter 15.75, hole 11.81, Top Layer to Bottom Layer, tented both sides, 907 vias
v2: diameter 19.68, hole 11.81, Top Layer to Bottom Layer, tented both sides, 30 vias

## Nets (pads, with @x,y where several pads share a name; then routed paths per layer and width w, separated by ;. In a path a pad name is that pad's centre, name@x,y a point inside that pad or via, vN(x,y) a via of type N, cw(c..) or ccw(c..) an arc to the next point about the centre after c; other vN are vias at no path point)
1WIRE: pad.3@3071.26,303.35 R10.2 U8.12 | length 954.7
  Top Layer w10: U8.12@2333.27,615.55 2464.45,615.55 2465,615 2906.98,615 R10.2@3072.05,449.93 ; pad.3@3071.26,303.35 3072.15,304.23 3072.15,449.04 R10.2@3073.03,449.93
3V3: C6.1 C8.1 C29.1 C38.1 C41.2 C42.2 C43.2 C44.2 IC1.8 pad.16 pad.17 R4.1 R6.2 R9.1 R16.1 R21.2 U8.1 U8.9 U8.24 U8.48 U12.2 U12.4 | length 5718.5
  Top Layer w10: R16.1@1564.56,1009.22 1605.78,1009.22 1625,990 1625,954.83 1596.54,926.36 1590.82,926.36 1586.96,922.5 R9.1@1586.96,921.52 ; v1@1965,635.28 1990.23,660.51 1994.76,660.51 C43.2@2000,665.75 2034.55,665.75 2035.53,666.73 U8.48@2065.55,666.73 ; C41.2@2065.75,525 2093.68,552.94 2093.68,562.98 2116.73,586.02 U8.1@2116.73,615.55 ; 2272.25,541.58 2273.87,543.19 2273.87,615.2 U8.9@2274.21,615.55 ; R21.2@2377.93,442.95 2378.97,443.99 2378.97,458.97 v1(2380,460) ; U8.24@2384.45,883.27 2458.27,883.27 C44.2@2475,900
  Top Layer w20: pad.16@1463.19,909.25 pad.17@1463.19,934.84 1514.7,934.84 C29.1@1524.31,925.24 ; C29.1@1525,924.76 1531.57,924.76 1531.78,924.55 1565.45,924.55 1568.48,921.52 R9.1@1586.96,921.52 1586.96,896.96 v1(1585,895) ; IC1.8@2050,1306.77 2050,1324 2091,1365 R6.2@2125.71,1365 ; C41.2@2065.75,525 2080,510.75 v1(2080,505) ; v1(2257.84,528.42) 2259.19,529.76 2274.02,529.76 C42.2@2274.25,530 ; C44.2@2475,900 v1(2507.13,900) ; v1(2955,787.13) 2962.98,795.11 R4.1@2981.2,795.11 ; v1(2975,875) C8.1@3025,875 ; C8.1@3025.71,874.76 3035.31,865.16 pad.17@3086.81,865.16 pad.16@3086.81,890.75
  Top Layer w30: v1(1945,1305) 1946.77,1306.77 IC1.8@2050,1306.77
  Top Layer w50: v1(3775,1225) 3789.93,1225 ; 3811.67,1225.06 3815.15,1221.58 3841.02,1221.58 3841.61,1220.99 C38.1@3841.61,1213.11 3975.98,1213.11 3992.59,1229.72 U12.4@4025,1229.72 U12.2@4025,970.28
  Bottom Layer w20: v1(2955,787.13) 2955,817.5 2975,837.5 v1(2975,875)
  Bottom Layer w50: v1(1585,895) 1585,790 1622.5,752.5 ; v1(1945,1305) 1840,1200 1840,925 1802.99,887.99 1757.99,887.99 1622.5,752.5 ; v1(1965,635) 1950,620 1950,575 ; 2255,540 2250,545 2250,825.63 2324.37,900 2525,900 2950,900 v1(2975,875) 2975,921.14 3151.93,1098.07 3667.22,1098.07 3789.93,1220.78 3789.93,1225.06 3775.06,1225.06 v1(3775,1225) ; 2257.72,520 2257.84,520.13 v1(2257.84,528.42) ; v1(2380,460) 2342.87,497.13 2312.24,497.13 2289.37,520 2250,520 2235,520 2207.87,492.87 2137.24,492.87 2125.12,505 v1(2080,505) 2020,505 1950,575 ; 1622.5,752.5 1800,575 1950,575
5V: 5V.1 C10.1 C15.1 C22.1 C25.1 C37.1 pad.1@403.35,696.26 pad.1@405,1045 pad.1@603.35,696.26 pad.1@605,1045 pad.1@1953.74,303.35 pad.1@2578.74,303.35 pad.1@2903.74,303.35 pad.1@3228.74,303.35 R10.1 R13.2 U12.3 | length 8234.1
  Top Layer w10: R13.2@2450.62,449.93 2474.93,449.93 v1(2475,450) 2578.74,346.26 pad.1@2578.74,303.35 ; R10.1@3102.56,449.93 3103.54,449.93 3107.4,446.07 3107.4,445.09 3208.15,344.34 3208.15,323.94 pad.1@3228.74,303.35
  Top Layer w30: pad.1@1953.74,303.35 1952.33,301.94 1952.33,188.26 C22.1@1950.93,186.85 1961.52,176.26 1998.74,176.26 v1(2000,175) ; pad.1@2578.74,303.35 2578.93,303.16 2578.93,183.83 C15.1@2579.12,183.64 2641.36,183.64 v1(2650,175) ; pad.1@2903.74,303.35 2904.84,302.24 2904.84,183.93 C25.1@2905.94,182.83 2967.17,182.83 v1(2975,175) ; pad.1@3228.74,303.35 3228.33,302.94 3228.33,183.18 C10.1@3227.92,182.77 3292.23,182.77 v1(3300,175)
  Top Layer w50: 5V.1@4045.87,653.35 4045.87,874.41 4046.46,875 C37.1@4053.15,875 ; C37.1@4061.02,875 4115.16,929.13 U12.3@4115.16,970.28
  Bottom Layer w50: pad.1@603.35,1046.26 278.74,1046.26 275,1050 ; pad.1@603.45,697.48 602.24,696.26 pad.1@403.35,696.26 402.76,696.85 353.15,696.85 275,775 275,1050 ; 5V.1@4045.87,653.35 4046.2,653.68 4046.2,718.8 3775,990 3329.29,990 3300,960.71 v1(3300,175) v1(2975,175) v1(2650,175) v1(2000,175) 1838.92,175 1574.37,439.55 1574.37,510.45 1250,834.82 1250,1292.84 1220.71,1322.13 1007.24,1322.13 1001.49,1327.87 689.68,1327.87 688.94,1327.13 377.13,1327.13 275,1225 275,1050
12V: 12V.1 C1.2 C2.1 C3.1 C4.2 C5.2 C7.2 C12.2 C20.2 C23.2 C27.2 U1.1 U2.1 U3.1 U4.1 U6.1 U7.1 U9.1 U10.1 VSOL1.1 VSOL2.1 VSOL3.1 VSOL4.1 VSOL5.1 VSOL6.1 VSOL7.1 VSOL8.1 | length 9851.1
  Top Layer w30: VSOL8.1@246.65,1764.37 192.13,1709.84 192.13,1663.04 229.23,1625.94 255.9,1625.94 293,1588.84 293,1570.17 C27.2@293.26,1569.91 293.26,1536.07 385.24,1444.09 U10.1@385.24,1420.47 ; VSOL7.1@746.65,1764.37 692.13,1709.84 692.13,1507.04 779.65,1419.52 C23.2@798.32,1419.52 822.55,1419.52 823.5,1420.47 U9.1@885.24,1420.47 ; VSOL6.1@1246.65,1764.37 1192.13,1709.84 1192.13,1503.63 1279.36,1416.39 1298.04,1416.39 C20.2@1298.3,1416.13 1319.16,1416.13 1323.5,1420.47 U7.1@1385.24,1420.47 ; VSOL5.1@1746.65,1764.37 1692.13,1709.84 1692.13,1507.7 1781.07,1418.76 1799.74,1418.76 C12.2@1800,1418.5 1821.54,1418.5 1823.5,1420.47 U6.1@1885.24,1420.47 ; VSOL4.1@2246.65,1764.37 2192.13,1709.84 2192.13,1506.67 2282.23,1416.57 C7.2@2300.9,1416.57 2319.6,1416.57 2323.5,1420.47 U4.1@2385.24,1420.47 ; VSOL3.1@2746.65,1764.37 2692.13,1709.84 2692.13,1507.7 2781.33,1418.5 C5.2@2800,1418.5 2821.54,1418.5 2823.5,1420.47 U3.1@2885.24,1420.47 ; VSOL2.1@3246.65,1764.37 3192.13,1709.84 3192.13,1507.87 3268.76,1431.24 3268.76,1431.07 3281.33,1418.5 3321.54,1418.5 3323.5,1420.47 U2.1@3385.24,1420.47 ; VSOL1.1@3746.65,1764.37 3692.13,1709.84 3692.13,1507.7 3781.07,1418.76 3799.74,1418.76 C1.2@3800,1418.5 3821.54,1418.5 3823.5,1420.47 U1.1@3885.24,1420.47
  Bottom Layer w50: VSOL8.1@246.65,1764.37 357.28,1875 636.02,1875 VSOL7.1@746.65,1764.37 857.28,1875 1136.02,1875 VSOL6.1@1246.65,1764.37 1357.28,1875 1636.02,1875 VSOL5.1@1746.65,1764.37 1751.18,1768.9 1857.28,1875 2136.02,1875 VSOL4.1@2246.65,1764.37 2357.28,1875 2636.02,1875 VSOL3.1@2746.65,1764.37 2857.28,1875 3136.02,1875 VSOL2.1@3246.65,1764.37 3251.18,1768.9 3251.18,1776.18 3350,1875 3635.03,1875 3741.13,1768.9 3742.13,1768.9 3745.66,1765.36 VSOL1.1@3745.66,1764.37 ; VSOL1.1@3746.65,1764.37 3857.28,1875 4246.85,1875 C2.1@4471.85,1650 4473.42,1648.43 4473.42,1201.58 4475,1200 4475,1196.49 4464.37,1185.86 12V.1@4464.37,853.35
AUX1: pad.3@603.35,853.74 U8.17 | length 2252.7
  Top Layer w10: v1(2315,745) 2315.24,745.24 2384.21,745.24 U8.17@2384.45,745.47
  Layer 2 w10: pad.3@603.35,853.74 741.26,853.74 825,770 955.8,770 1001.31,815.51 1424.49,815.51 1755,485 2037.5,485 2102.5,420 2181.77,420 2280.72,518.95 2280.72,605.46 2272.13,614.05 2272.13,702.13 v1(2315,745)
AUX2: pad.3@403.35,853.74 U8.29 | length 2523.4
  Top Layer w10: v1(2249.37,885.63) 2249.37,887.19 2254.18,892 2254.18,934.1 U8.29@2254.53,934.45
  Layer 2 w10: pad.3@403.35,853.74 479.61,930 700,930 790,840 1435,840 1747.56,527.44 2044.79,527.44 2045.22,527.87 2126.67,527.87 2159.54,495 2224.54,495 2230.4,500.86 2230.4,509.6 2230,510 2230,709.78 2184.25,755.53 2184.25,774.47 2249.37,839.59 v1(2249.37,885.63)
AUX3: pad.3@605,1202.48 U8.32 | length 2592.2
  Top Layer w10: U8.32@2195.47,934.45 2195.82,934.8 2195.82,970.82 2203.01,978.01 2203.01,988.9 v1(2204.11,990)
  Layer 2 w10: pad.3@605,1202.48 825.76,1202.48 835.91,1212.64 1052.36,1212.64 1055,1210 1114.54,1210 1152.54,1172 1393.05,1172 1435,1130.05 1435,890 1735,590 2090,590 2157.37,522.63 2181.73,522.63 2195.13,536.03 2195.13,719.2 2166.25,748.07 2166.25,792.24 2204.01,830 2214.32,830 2226.49,842.17 2226.49,968.51 2205,990 v1(2204.11,990)
AUX4: pad.3@405,1202.48 U8.38 | length 2336
  Top Layer w10: v1(1995,890) 1996.1,888.9 2006.48,888.9 2031.45,863.93 2065.2,863.93 U8.38@2065.55,863.58
  Layer 2 w10: pad.3@405,1202.48 498.68,1202.48 539.27,1243.07 1106.93,1243.07 1160,1190 1400.51,1190 1453,1137.51 1453,917 1720,650 1940,650 2070,780 2070,820 2035.55,854.45 2030.55,854.45 v1(1995,890)
DE: IC1.2 IC1.3 R2.1 U8.33 | length 373.3
  Top Layer w10: R2.1@1996.78,1162.43 2029.83,1162.43 2030.28,1162.87 2059.47,1162.87 2092.2,1130.14 2092.2,1101.02 IC1.2@2100,1093.23 IC1.3@2150,1093.23 2150,1076 2181.24,1044.77 2181.24,986.42 2175.79,980.97 U8.33@2175.79,934.45
DIR1: pad.20@3086.81,788.39 R7.2 U8.20 | length 755.2
  Top Layer w10: U8.20@2384.45,804.53 2433.48,804.53 2436.96,801.05 2463.79,801.05 2463.86,801.12 2472.36,801.12 ; 2472.38,801.1 2480.61,801.1 2487.48,794.22 v1(2489.04,794.22) ; R7.2@3020.82,788.47 3021.59,789.23 3044.23,789.23 v1(3045,790) 3045.81,789.19 3086,789.19 pad.20@3086.81,788.39
  Layer 2 w10: v1(2489.04,794.22) 2600.51,794.22 2630.48,764.25 3019.25,764.25 v1(3045,790)
DIR2: pad.20@1463.19,1011.61 R18.2 U8.42 | length 760.6
  Top Layer w10: pad.20@1463.19,1011.61 1464.07,1010.73 v1(1505,1010.73) 1524.11,1010.73 R18.2@1525,1009.84 ; v1(1994.91,787.44) 1996.46,787.44 1999.06,784.84 U8.42@2065.55,784.84
  Layer 2 w10: v1(1505,1010.73) 1542.13,973.6 1542.13,942.87 1567.13,917.87 1594.47,917.87 1597.73,914.61 1609.47,914.61 1622.87,901.22 1622.87,885.68 1741.43,767.13 1865.04,767.13 1869.92,772 1978,772 1993.44,787.44 v1(1994.91,787.44)
EN1: pad.21@3086.81,762.8 R4.2 U8.19 | length 747
  Top Layer w10: U8.19@2384.45,784.84 2427.71,784.84 2429.51,783.05 2443.38,783.05 2447.09,779.34 2464.41,779.34 v1(2465.51,778.24) ; v1(2980,740) 2980.6,740.6 2980.6,764.98 R4.2@2981.2,765.58 3066.31,765.58 3069.09,762.8 pad.21@3086.81,762.8
  Layer 2 w10: v1(2465.51,778.24) 2467.06,778.24 2475.31,770 2585,770 2615,740 v1(2980,740)
EN2: pad.21@1463.19,1037.2 R16.2 U8.41 | length 730.3
  Top Layer w10: pad.21@1463.19,1037.2 1463.96,1037.97 1563.79,1037.97 R16.2@1564.56,1038.74 1565.18,1039.37 1594.37,1039.37 v1(1595,1040) ; v1(1983.11,810.33) 2007.74,810.33 2013.54,804.53 U8.41@2065.55,804.53
  Layer 2 w10: v1(1595,1040) 1595,990 1749.85,835.15 1958.29,835.15 v1(1983.11,810.33)
FLOW: C21.1 pad.3@2421.26,303.35 R13.1 U8.10 | length 421
  Top Layer w10: U8.10@2293.9,615.55 2294.24,615.2 2294.24,565.76 2300,560 2309.93,560 2318.81,551.12 2347.73,551.12 2356.61,560 2377.35,560 2410.22,527.13 2415.56,527.13 2421.42,521.27 C21.1@2421.42,497.52 2421.25,497.35 2421.25,450.09 R13.1@2421.09,449.93 2421.18,449.84 2421.18,303.43 pad.3@2421.26,303.35
FLT: C9.1 pad.18 R9.2 U8.43 | length 1771.2
  Top Layer w10: pad.18@1463.19,960.43 1510.62,960.43 1513.22,957.84 1533.27,957.84 1540.07,951.05 v1@1575.86,951.05 ; v1(1575.86,958.15) 1576.96,957.05 1580.95,957.05 1582.12,955.89 1583.1,955.89 1586.96,952.03 R9.2@1586.96,951.05 ; v1(1825,790) 1848.65,766.35 C9.1@1874.03,766.35 1929,766.35 1937.65,775 1975,775 1985.43,764.57 2027.15,764.57 2027.39,764.81 2065.2,764.81 U8.43@2065.55,765.16 2065.63,765.08 2207.05,765.08 v1(2207.13,765) ; v1(3044.85,837.28) 3045.95,838.38 3085.63,838.38 pad.18@3086.81,839.57
  Layer 2 w10: v1(1575.86,958.15) 1577.41,958.15 1592.66,942.91 1594.89,942.91 1605.19,932.61 1616.93,932.61 1739.55,810 1805,810 v1(1825,790) ; v1(2207.13,765) 2252.13,810 2395,810 2402.1,817.1 2540.65,817.1 2545.53,812.22 2607.97,812.22 2610.19,810 2957.35,810 2990.22,842.87 3014.12,842.87 3019.71,837.28 v1(3044.85,837.28)